# EAGLE board PCB-BODYGUARD (EAGLE 8.1.1)
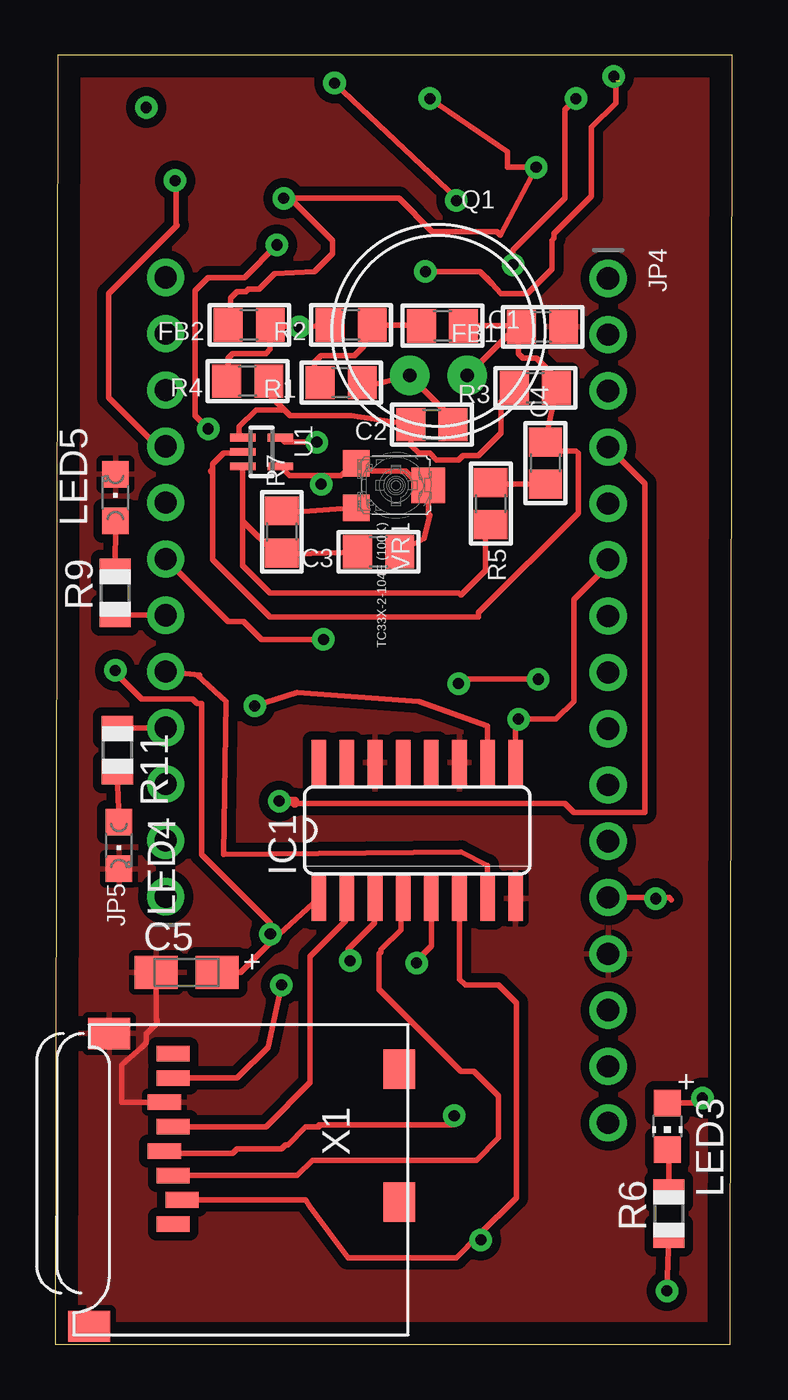
[diagram p0: board, top side]
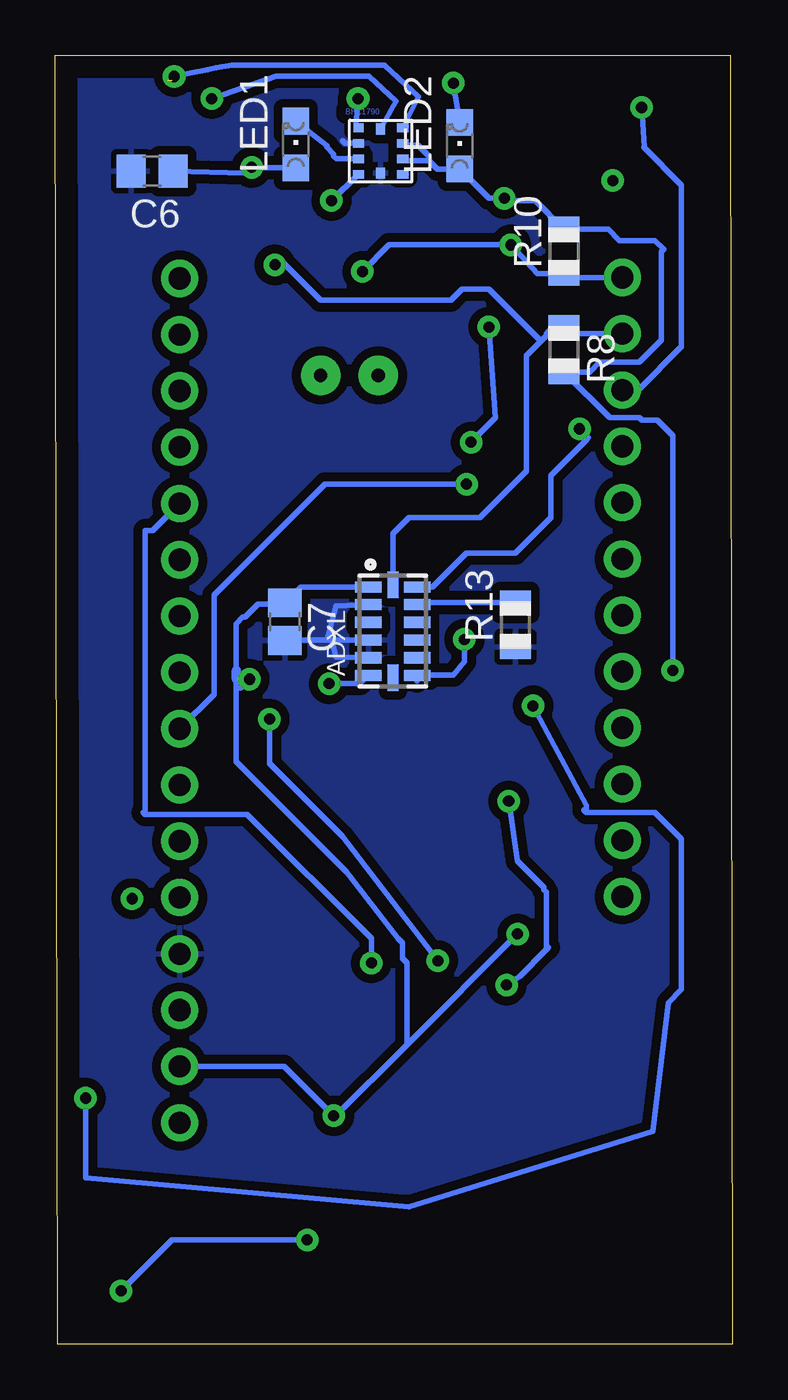
[diagram p1: board, bottom side, seen from below]

Size 30.56 x 58.15 mm. Coordinates in mm from the lower left corner, seen from the top.
Outline: 0,0 30.46,0 30.56,58.15 0.1,58.15 0,0
Copper layers (1*16): Top 0.035mm / dielectric 1.5mm / Bottom 0.035mm
Design rules "default": minimum track width 10mil, minimum drill 24mil, track to track 8mil, track to pad 8mil, pad to pad 8mil, via to via 8mil, smd to smd 8mil, copper to edge 40mil, drill to drill 8mil, minimum pad ring 10mil, minimum via ring 8mil, stop-mask expansion 4mil, vias tented up to drill 0mil, thermal gap 10mil

## Footprints (pad centres in the part's own frame; a part is rotated, then mirrored left to right if it is on the bottom)
LGA14 = smd 0.5 x 1.2: 1 2,1.1; 2 1.2,1.1; 3 0.4,1.1; 4 -0.4,1.1; 5 -1.2,1.1; 6 -2,1.1; 8 -2,-1.1; 9 -1.2,-1.1; 10 -0.4,-1.1; 11 0.4,-1.1; 12 1.2,-1.1; 13 2,-1.1 | smd 1.2 x 0.5: 7 -2.1,0; 14 2.1,0
BH1790 = smd 0.5 x 0.4: GND -1,0.35; LED1 -1,-0.35; LED2 -1,-1.05; SDA 1,1.05; TEST2 1,-0.35; TEST3 1,-1.05; VCC -1,1.05; VCC2 1,0.35 | smd 0.4 x 0.5: SCL 0,1; TEST1 0,-1
0805 = smd 1.3 x 1.5: 1 -0.95,0; 2 0.95,0
A/3216-18R = smd 1.95 x 1.5: + 1.375,0; - -1.375,0
C0805 = smd 1.3 x 1.5: 1 -0.95,0; 2 0.95,0
C0805' = smd 1.3 x 1.5: 1 -0.85,0; 2 0.85,0
SO16 = smd 0.66 x 2.032: 1 -4.445,-3.073; 2 -3.175,-3.073; 3 -1.905,-3.073; 4 -0.635,-3.073; 5 0.635,-3.073; 6 1.905,-3.073; 7 3.175,-3.073; 8 4.445,-3.073; 9 4.445,3.073; 10 3.175,3.073; 11 1.905,3.073; 12 0.635,3.073; 13 -0.635,3.073; 14 -1.905,3.073; 15 -3.175,3.073; 16 -4.445,3.073
1X16_ROUND = drill 1 pad 1.676: 1 -19.05,0; 2 -16.51,0; 3 -13.97,0; 4 -11.43,0; 5 -8.89,0; 6 -6.35,0; 7 -3.81,0; 8 -1.27,0; 9 1.27,0; 10 3.81,0; 11 6.35,0; 12 8.89,0; 13 11.43,0; 14 13.97,0; 15 16.51,0; 16 19.05,0
1X12_ROUND = drill 1 pad 1.676: 1 -13.97,0; 2 -11.43,0; 3 -8.89,0; 4 -6.35,0; 5 -3.81,0; 6 -1.27,0; 7 1.27,0; 8 3.81,0; 9 6.35,0; 10 8.89,0; 11 11.43,0; 12 13.97,0
CHIPLED_0805 = smd 1.2 x 1.2: A 0,-1.05; C 0,1.05
CHIP-LED0805 = smd 1.2 x 1.2: A 0,-1.05; C 0,1.05
ELECTRET_9.7 = drill 0.6 pad 1.778: + 1.3,2; - -1.3,2
R0805 = smd 1.1 x 1.4: 1 -1,0; 2 1,0
SC70-5 = smd 0.35 x 1.15: 1 -0.65,-0.85; 2 0,-0.85; 3 0.65,-0.85; 4 0.65,0.85; 5 -0.65,0.85
TRIMPOT_BOURNS_TC33X-2 = smd 1.2 x 1.2: 1 -1,-1.8; 3 1,-1.8 | smd 1.6 x 1.5: 2 0,1.45
MICROSD = smd 0.7 x 1.5: 1 9,-10.64; 2 7.9,-10.24; 3 6.8,-10.64; 4 5.7,-11.04; 5 4.6,-10.64; 6 3.5,-11.04; 7 2.4,-10.64; 8 1.3,-10.64 | smd 1.8 x 1.4: CD1 2,-0.44; CD2 8,-0.44 | smd 1.4 x 1.9: MT1 0.4,-13.54; MT2 13.6,-14.44

## Placement (x,y rotation side)
ADXL  [LGA14]  15.33,32.17 90 bottom
BH1790  BH1790  [BH1790]  15.88,53.83 0 bottom
C1  0.1µF  [0805]  17.47,45.95 0 top
C2  0.01uF  [0805]  17,41.49 180 top
C3  100pF  [0805]  14.59,35.75 180 top
C4  10uF  [0805]  22.12,39.75 90 top
C5  10uF  [A/3216-18R]  5.92,16.77 0 top
C6  1uF  [C0805]  26.19,52.93 180 bottom
C7  0.1uF  [C0805']  20.2,32.6 270 bottom
FB1  FERRITE  [0805]  21.99,45.9 180 top
FB2  FERRITE  [0805]  8.75,45.99 180 top
IC1  4050D  [SO16]  16.33,23.18 0 top
JP4  [1X16_ROUND]  24.95,29.04 270 top
JP5  [1X12_ROUND]  4.97,34.16 90 top
LED1  green  [CHIPLED_0805]  19.71,54.13 0 bottom
LED2  green  [CHIPLED_0805]  12.31,54.07 0 bottom
LED3  RED  [CHIP-LED0805]  27.62,9.83 180 top
LED4  Red  [CHIPLED_0805]  2.87,22.5 180 top
LED5  green  [CHIPLED_0805]  2.71,38.2 0 top
Q1  CMA-4544PF-W  [ELECTRET_9.7]  17.29,45.71 180 top
R1  1K  [0805]  12.9,43.39 180 top
R2  1K  [0805]  13.35,45.99 180 top
R3  1M  [0805]  21.67,43.15 180 top
R4  1M  [0805]  8.68,43.45 180 top
R5  1K  [0805]  19.65,37.93 270 top
R6  1K  [R0805]  27.69,5.89 90 top
R7  22K  [0805]  10.22,36.65 90 top
R8  10K  [R0805]  7.61,44.87 270 bottom
R9  1K  [R0805]  2.7,33.9 90 top
R10  10K  [R0805]  7.6,49.32 90 bottom
R11  1K  [R0805]  2.8,26.8 270 top
R13  10K  [R0805]  9.8,32.46 90 bottom
U1  MAX4466EXK+T  [SC70-5]  9.31,40.26 270 top
VR1  TC33X-2-104E (100K)  [TRIMPOT_BOURNS_TC33X-2]  15.38,38.74 270 top
X1  MICROSD  [MICROSD]  15.96,14.41 270 top

## Library data of the parts
ADXL C1-C4 FB1 FB2 JP4 JP5 Q1 R1-R5 R7 U1 VR1 = microbuilder
BH1790 = quentin
C5 C7 LED1-LED5 R6 R8-R11 R13 X1 = adafruit
C6 = resistor
IC1 = 40xx

## Nets
!RESET: JP4.16
+3V3: ADXL.1 ADXL.6 BH1790.TEST2 BH1790.VCC BH1790.VCC2 C5.+ C6.1 C7.1 FB2.2 IC1.1 JP4.15 LED1.A LED2.A R8.2 R10.2 X1.4
A0: JP4.12
A1: JP4.11
A2: JP4.10
A3: C3.1 JP4.9 U1.4 VR1.1 VR1.2
A4: JP4.8
A5: JP4.7
AGND: C1.2 C4.2 FB1.2 Q1.- R3.1 U1.2
AREF: JP4.14
AVCC: FB2.1 R2.2 R4.2 U1.5
D0: JP4.3
D1: JP4.2
D5: JP5.10
D6: JP5.9
D9: JP5.8
D10: ADXL.8 JP5.7
D11: JP5.6 R9.1
D12: IC1.7 JP5.5
D13: JP5.4 R11.1
DFU: JP4.1
EN: JP5.2
GND: ADXL.2 ADXL.4 ADXL.5 BH1790.GND BH1790.TEST1 C5.- C6.2 C7.2 FB1.1 IC1.8 IC1.11 IC1.14 JP4.13 LED4.C LED5.C R13.1 X1.6 X1.MT1 X1.MT2
INT2: ADXL.9
MISO: JP4.4 X1.7
MOSI: IC1.5 JP4.5
N$1: C3.2 R5.2 R7.1 U1.3
N$2: R7.2 VR1.3
N$3: C2.1 Q1.+ R1.1
N$4: C1.1 R1.2 R2.1
N$5: C2.2 R3.2 R4.1 U1.1
N$6: BH1790.LED1 LED1.C
N$7: C4.1 R5.1
N$8: IC1.10 LED3.A
N$9: IC1.2 X1.5
N$10: IC1.6 R6.1 X1.2
N$11: LED3.C R6.2
N$12: IC1.4 X1.3
N$14: BH1790.LED2 LED2.C
N$16: LED5.A R9.2
N$17: LED4.A R11.2
SCK: IC1.3 IC1.9 JP4.6
SCL: ADXL.14 BH1790.SCL JP5.11 R8.1
SDA: ADXL.13 BH1790.SDA JP5.12 R10.1
SDO/ADDR: ADXL.12 R13.2
VBAT: JP5.1
VBUS: JP5.3

## Tracks (layer width: path | path; a pad name or v marks a point on that pad's centre or on a via)
+3V3  (via drill 0.5 pad 1.02)
  Top 0.25: IC1.1 9.84,18.26 | 9.84,18.26 8.35,16.77 C5.+ | 9.84,18.26 9.7,18.4 v9.7,18.5 9.7,19 6.6,22.1 6.6,26.4 | v18,10.3 18,9.9 11.9,9.9 11.9,9.8 11.3,9.8 10.5,9 10.4,9 10.2,8.8 8.2,8.8 8,8.6 5.03,8.6 X1.4 | 6.6,26.4 6.6,26.6 | v16.9,56.2 20.4,53.8 20.4,53.1 v21.7,53.1 20.08,50.05 19.93,50.2 17,50.2 15.5,51.7 v10.3,51.7 10.6,51.7 12.5,49.8 12.5,49.2 11.7,48.4 9.9,48.3 9.2,47.6 8.7,47.6 8.6,47.5 8.2,47.5 7.9,47.2 7.9,46.09 FB2.2 | v21.8,30 18,30 v18.2,29.8 | v2.7,30.4 2.7,30.3 3.9,29.1 6.2,29.1 6.4,28.9 6.6,28.9 6.6,26.4
  Bottom 0.25: ADXL.1 19.48,34.17 C7.1 20.25,33.4 21.4,33.4 22,32.8 22.1,32.8 22.4,32.5 22.4,30.4 22.4,26.3 17.41,21.32 15.1,18.3 14.9,18.1 14.9,17.4 14.7,17.2 14.7,13.5 | v9.7,18.5 14.7,13.5 | 14.7,13.5 18,10.2 v18,10.3 20.23,12.53 JP4.15 | 16.8,54.96 BH1790.VCC 17,55 v16.9,56.2 | LED1.A 21.48,53.08 21.5,53.1 v21.7,53.1 21.97,52.83 C6.1 | LED2.A 12.5,52.91 | LED2.A 13.32,53.02 13.7,53.4 | 13.7,53.4 14.8,53.4 BH1790.TEST2 | 13.7,53.4 13.7,53.6 14.2,54.1 14.8,54.1 BH1790.VCC2 | 22.4,29.6 22.2,29.6 v21.8,30 | v18.2,29.8 16.8,29.8 ADXL.6 | v2.7,30.4 2.7,41 3.4,41.7 4.1,41.7 4.2,41.8 5.54,41.8 R8.2 6.43,43.87 6,44.3 4.2,44.3 3.2,45.3 3.2,49.3 3.1,49.4 3.5,49.8 5.1,49.8 5.6,50.3 7.58,50.3 R10.2 7.62,50.32 8.9,51.6 10.2,51.6 v10.3,51.7 10.99,51.7 LED2.A
  Bottom 0.406: v21.8,30 22.4,30 22.4,30.4
A0
  Top 0.25: JP4.12 27.7,20.15 27.8,20.05
A3  (via drill 0.5 pad 1.02)
  Top 0.25: U1.4 10.57,39.2 12.2,39.2 | 12.2,39.2 12.9,39.2 13.24,39.54 VR1.1 14.32,39.4 15.8,39.4 16.66,38.54 VR1.2 16.83,37.4 16.9,37.4 16.64,36.34 C3.1 | 12.2,39.2 12.2,39 v12,38.8
  Bottom 0.25: v12,38.8 18.4,38.8 23.4,33.8 23.4,29.32 JP4.9
AGND
  Top 0.25: FB1.2 20.99,45.95 C1.2 | 20.98,45.9 FB1.2 | FB1.2 20.9,45.76 20.9,44.7 21.1,44.5 21.7,44.5 22.62,43.58 R3.1 C4.2 22.52,40.3 23.5,40.3 23.6,40.2 23.6,37.5 19.1,33 19.1,32.8 9.7,32.8 7.1,35.4 7.1,39.5 | Q1.- 18.7,43.22 18.7,43.8 20.8,45.9 FB1.2 | U1.2 8.4,40.2 7.6,40.2 7.1,39.7 7.1,39.5 | 7.1,39.5 7,39.4 7.1,39.3
AVCC  (via drill 0.5 pad 1.02)
  Top 0.25: R2.2 v11,45.89 FB2.1 9.7,44.9 9.5,44.7 8,44.7 7.8,44.5 7.8,43.52 R4.2 | U1.5 10.37,40.7 v11.8,40.7
  Bottom 0.25: 10.8,45.99 v11,45.89 10.7,41.8 v11.8,40.7
D5
  Bottom 0.25: JP5.10 4.25,43.05 2.3,45 2.3,52.3 4,54 3.98,54 4.1,55.82
D6
  Top 0.25: JP5.9 4.59,40.51 2.4,42.7 2.4,47.4 5.5,50.5 5.44,50.5 5.46,52.42
D10  (via drill 0.5 pad 1.02)
  Top 0.25: JP5.7 7.8,32.6 8.5,32.6 9.3,31.8 v12.1,31.8
  Bottom 0.25: 14.23,29.93 ADXL.8 14.1,30.2 12.6,30.2 12.1,30.8 v12.1,31.8
D11
  Top 0.25: JP5.6 R9.1
D12
  Top 0.25: JP5.5 6.52,30.2 6.4,30.2 7.7,29 7.6,22.1 18.3,22.2 19.5,21.6 19.5,20.31 IC1.7
D13
  Top 0.25: JP5.4 2.31,27.81 R11.1
GND
  Top 0.25: C5.- 4.54,14.65 4.6,14.6 4.6,14.5 4.1,14 4.1,13.6 3.9,13.4 3,12.6 3,10.9 3.01,10.91 X1.6
  Bottom 0.25: ADXL.4 18.1,31.77 | 18.3,31.77 18.1,31.77 | 18.3,31.77 20.18,31.77 C7.2 | ADXL.5 17.9,31 18.1,31.77 | ADXL.2 17.9,33.3 18.3,31.77 | BH1790.GND 17.48,54.18 17.6,54.3
  pour Top (isolate 0.4): 0,-0.1 30.6,-0.1 30.6,58.2 0,58.2
  pour Bottom (isolate 0.4): -0.1,0 30.5,0 30.6,0 30.6,58.1 30.6,58.2 -0.1,58.2 -0.1,58.1
MISO  (via drill 0.5 pad 1.02)
  Top 0.25: X1.7 8.21,12.01 9.6,13.4 v10.2,16.2 | 10.8,24.4 23,24.4 23.4,24 26.6,24 26.6,38.82 JP4.4
  Top 0.406: v10.1,24.5 10.8,24.5 10.8,24.4
  Bottom 0.25: v10.2,16.2 9.6,16.6 8.4,17.8 | 8.4,17.8 8.3,17.9 | 8.4,17.8 8.4,20.4 8.5,20.5 8.5,20.6 9.7,21.8 v10.1,24.5
MOSI  (via drill 0.5 pad 1.02)
  Top 0.25: IC1.5 16.96,17.96 16.3,17.3 v16.3,17.2
  Bottom 0.25: v16.3,17.2 16.3,18.3 21.9,23.9 26.5,23.9 | 26.5,23.9 26.6,24 | 26.5,23.9 26.5,36.7 26.18,36.7 JP4.5
N$1
  Top 0.25: C3.2 10.87,35.65 R7.1 10.72,35.6 10,35.6 8.46,37.14 | U1.3 8.46,37.14 | 8.46,37.14 8.46,35.14 9.7,33.9 18.2,33.9 18.3,33.8 19.4,34.9 19.4,36.73 R5.2
N$2
  Top 0.25: R7.2 10.88,37.54 VR1.3
N$3
  Top 0.25: R1.1 14.03,43.21 Q1.+ 17.95,41.75 C2.1
N$4
  Top 0.25: R1.2 11.7,43.64 11.7,44.3 12,44.6 13.5,44.6 13.9,45 R2.1 16.48,45.99 C1.1
N$5
  Top 0.25: 20.8,43.15 R3.2 20.1,42.53 20.1,41.1 19.1,40.1 18.4,40.1 18.2,39.9 17.2,39.9 16.9,40.2 16.4,40.2 16.05,40.55 C2.2 13.34,41.9 10.6,41.9 10.35,42.15 | 10.35,42.15 9.63,42.87 R4.1 | U1.1 8.3,41.07 8.3,41.4 9.05,42.15 10.35,42.15
N$6
  Bottom 0.25: BH1790.LED1 17.88,53.48 18,53.6 18,53.7 18.3,54 18.3,54.07 LED1.C
N$7
  Top 0.25: C4.1 19.73,38.8 R5.1
N$8  (via drill 0.5 pad 1.02)
  Top 0.25: IC1.10 19.5,26.46 19.5,27.9 16.4,29 10.9,29.4 v9,28.8 | v29.2,11.1 28.98,10.88 LED3.A
  Bottom 0.25: v29.2,11.1 29.2,7.5 14.6,6.2 3.6,9.6 2.9,15.4 2.3,16 2.3,22.8 3.5,24 6.6,24 | 6.6,24 6.7,24.1 | 6.6,24 6.6,24.3 v9,28.8
N$9
  Top 0.25: IC1.2 13.1,20.25 13.1,19.1 11.5,17.5 11.5,11.8 9.51,9.81 X1.5
N$10  (via drill 0.5 pad 1.02)
  Top 0.25: X1.2 11.3,6.5 11.5,6.2 13.2,3.9 18.1,3.9 19.1,4.9 | 19.1,4.9 20.8,6.6 20.8,15.4 20,16.2 18.5,16.2 18.23,16.46 IC1.6 | 19.1,4.9 19.2,4.9 v19.2,4.7 | v27.6,2.4 R6.1
  Bottom 0.25: v19.2,4.7 25.3,4.7 v27.6,2.4
N$11
  Top 0.25: LED3.C 27.69,8.71 R6.2
N$12
  Top 0.25: IC1.4 15.6,20.21 15.6,18.7 14.7,17.8 14.7,17.7 14.6,17.6 14.6,16 18.3,12.3 18.9,12.3 20,11.2 20,9.3 19,8.3 11.6,8.3 10.91,7.61 X1.3
N$14  (via drill 0.5 pad 1.02)
  Top 0.25: v12.6,56.9 18.1,51.7 v18.1,51.6
  Bottom 0.25: LED2.C 12.6,56.8 v12.6,56.9 | v18.1,51.6 BH1790.LED2
N$16
  Top 0.25: R9.2 LED5.A
N$17
  Top 0.25: R11.2 LED4.A
S$1  (via drill 0.5 pad 1.02)
  other vias: 27.1,20.1
S$3  (via drill 0.5 pad 1.02)
  other vias: 5.4,52.5
S$4  (via drill 0.5 pad 1.02)
  other vias: 4.1,55.8
SCK  (via drill 0.5 pad 1.02)
  Top 0.25: 24.86,35.3 JP4.6 24.95,35.15 23.4,33.6 23.4,29 22.6,28.2 v20.9,28.2 20.77,28.07 IC1.9 20.8,26.45 | IC1.3 14.43,19.2 14.4,19.2 14.4,19 13.2,17.8 13.2,17.6 v13.3,17.3
  Bottom 0.25: v13.3,17.3 17.6,22.9 20.9,26.2 v20.9,28.2 20.86,28.2
SCL  (via drill 0.5 pad 1.02)
  Top 0.25: v20.65,48.7 20.65,49.35 23,51.7 23,55.7 v23.5,56.2
  Bottom 0.25: JP5.11 7.33,45.59 R8.1 7.78,45.7 8.3,45.7 8.4,45.6 8.4,45.5 8.65,45.25 | ADXL.14 15.33,36.57 14.6,37.3 11.4,37.3 9.3,39.4 9.3,44.6 8.65,45.25 | BH1790.SCL 15.18,56.08 16.4,57.2 20.6,57.2 v23.5,56.2 | 8.65,45.25 11,47.6 12.2,47.6 12.7,47.1 18.6,47.1 20.4,48.9 v20.65,48.7
SDA  (via drill 0.5 pad 1.02)  (1 unrouted)
  Top 0.25: v6.9,41.3 6.3,41.9 6.3,47.53 6.9,48.13 8.53,48.13 v10,49.6 | v25.2,57.2 25.5,57 | 19.7,47.86 19.5,48.1 | 19.7,47.86 20.1,47.4 21.3,47.4 22.4,48.5 22.4,49.8 22.5,49.9 22.5,50.1 24.2,51.8 24.2,54.9 25.3,56 25.3,57.01 | v16.7,48.4 19.17,48.4 19.7,47.86
  Bottom 0.25: JP5.12 7.41,48.13 R10.1 | ADXL.13 13.53,34.17 12,35.7 9.8,35.7 8.2,37.3 8.2,39.2 6.6,40.8 | 6.6,40.8 6.5,40.9 | 6.6,40.8 6.6,41 v6.9,41.3 | 7.72,48.2 R10.1 | BH1790.SDA 14.18,56.28 15.7,57.7 22.6,57.7 23.3,57.6 23.7,57.5 v25.2,57.2 | v16.7,48.4 16.7,48.2 | v16.7,48.4 16.7,48.5 | R10.1 7.62,48.3 8.8,48.3 v10,49.6 15.5,49.6 v16.7,48.4
SDO/ADDR
  Bottom 0.25: R13.2 14.14,33.46 ADXL.12